# EAGLE board Adafruit 2.13in Tri-Color eInk with EYESPI (EAGLE 9.6.2)
REV: D
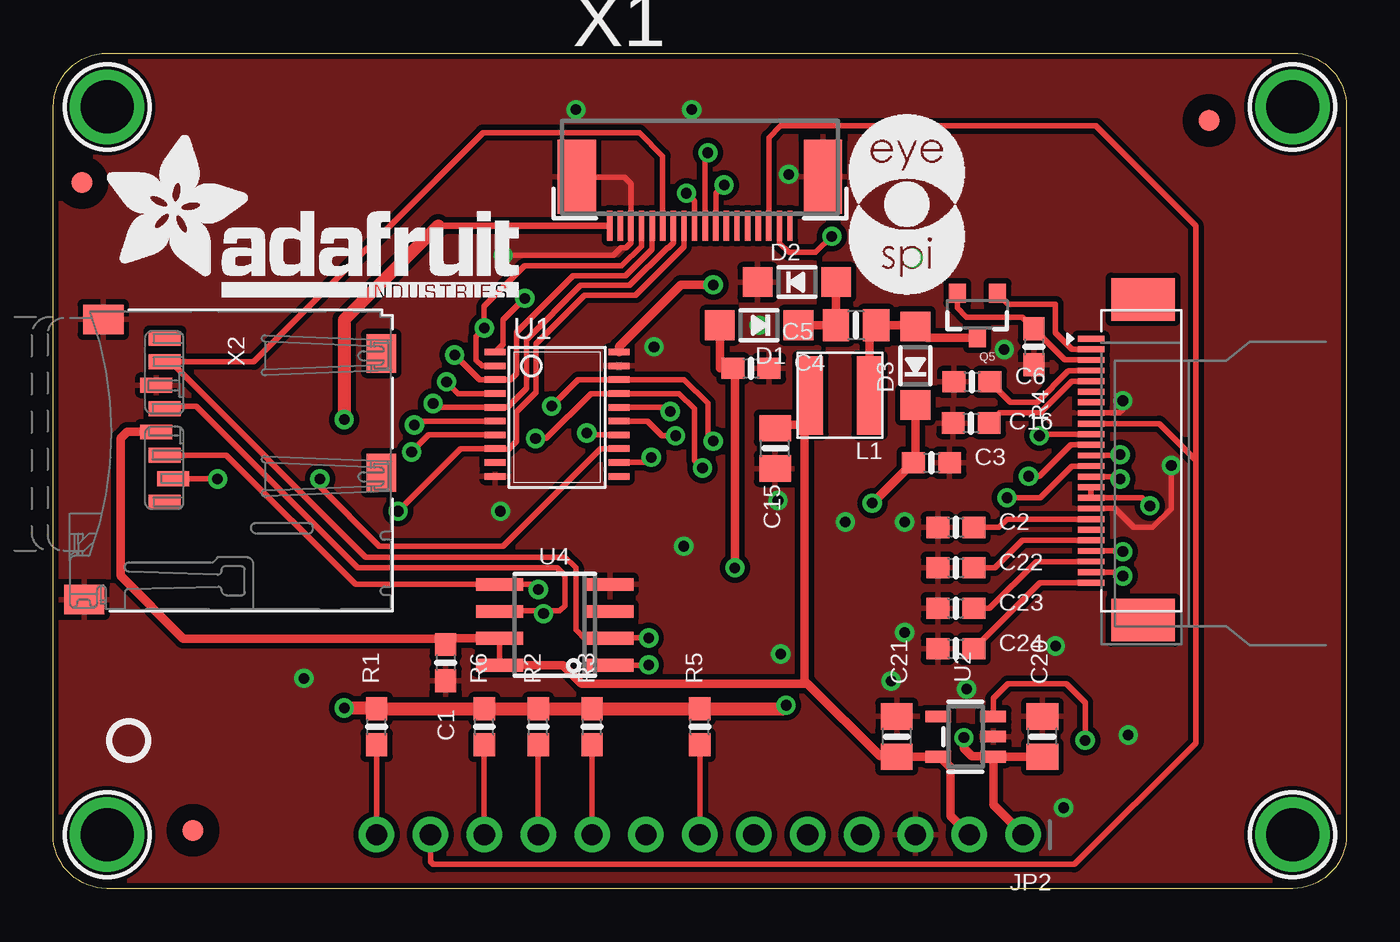
[diagram p0: board, top side]
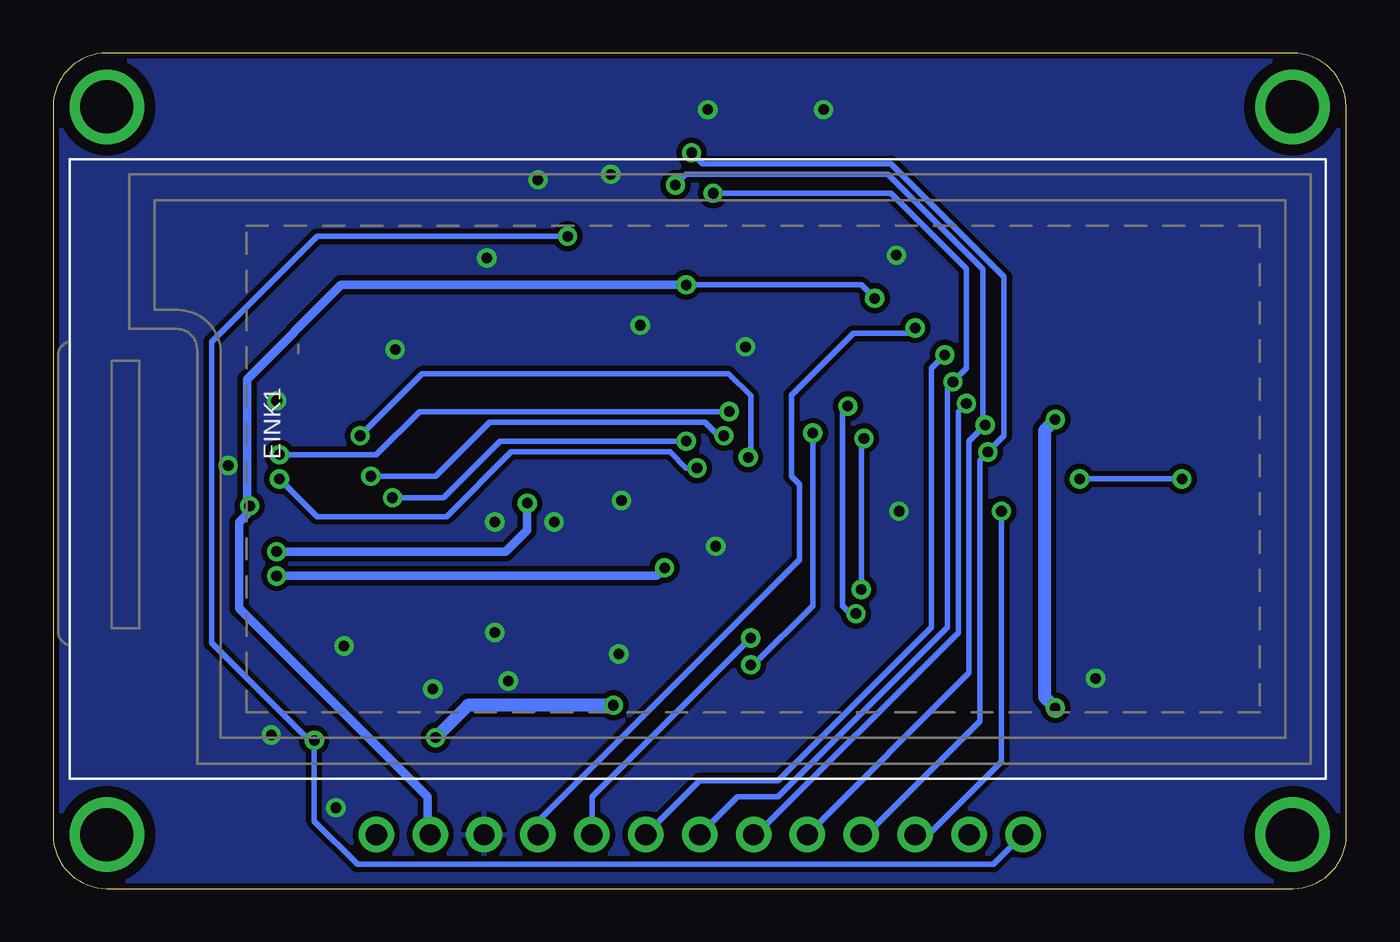
[diagram p1: board, bottom side, seen from below]

Size 60.97 x 39.37 mm. Coordinates in mm from the lower left corner, seen from the top.
Outline: 58.43,0 2.54,0 arc-90 0,2.54 0.01,36.83 arc-90 2.55,39.37 58.43,39.37 arc-90 60.97,36.83 60.97,2.54 arc-90 58.43,0
Copper layers (1*16): Top 0.035mm / dielectric 1.5mm / Bottom 0.035mm
Design rules "adafruit *": minimum track width 8mil, minimum drill 15.5mil, track to track 8mil, track to pad 8mil, pad to pad 8mil, via to via 8mil, smd to smd 8mil, copper to edge 10mil, drill to drill 8mil, minimum pad ring 10mil, minimum via ring 8mil, stop-mask expansion 2mil, vias tented up to drill 20mil, thermal gap 10mil

## Footprints (pad centres in the part's own frame; a part is rotated, then mirrored left to right if it is on the bottom)
0603-NO = smd 1.075 x 1: 1 -0.85,0; 2 0.85,0
0805-NO = smd 1.24 x 1.5: 1 -0.95,0; 2 0.95,0
SOD-123 = smd 1.4 x 1.4: A 1.85,0; C -1.85,0
EINK_213IN_104X212 = smd 0.275 x 1.25 bottom: 1 5.78,-0.87; 2 5.28,-0.87; 3 4.78,-0.87; 4 4.28,-0.87; 5 3.78,-0.87; 6 3.28,-0.87; 7 2.78,-0.87; 8 2.28,-0.87; 9 1.78,-0.87; 10 1.28,-0.87; 11 0.78,-0.87; 12 0.28,-0.87; 13 -0.22,-0.87; 14 -0.72,-0.87; 15 -1.22,-0.87; 16 -1.72,-0.87; 17 -2.22,-0.87; 18 -2.72,-0.87; 19 -3.22,-0.87; 20 -3.72,-0.87; 21 -4.22,-0.87; 22 -4.72,-0.87; 23 -5.22,-0.87; 24 -5.72,-0.87 | smd 2 x 3 bottom: SPRT1 7.63,1.59; SPRT2 -7.48,1.59
FIDUCIAL_1MM = smd 1 x 1: 1 0,0
1X13_ROUND_70 = drill 1 pad 1.676: 1 -15.24,0; 2 -12.7,0; 3 -10.16,0; 4 -7.62,0; 5 -5.08,0; 6 -2.54,0; 7 0,0; 8 2.54,0; 9 5.08,0; 10 7.62,0; 11 10.16,0; 12 12.7,0; 13 15.24,0
INDUCTOR_4X4MM_NR401 = smd 1.2 x 3.7: P$1 -1.4,0; P$2 1.4,0
SOT23-3 = smd 0.8 x 0.9: 1 -0.95,-1; 2 0.95,-1; 3 0,1.1
TSSOP20 = smd 0.305 x 0.991: 1 -2.925,-2.918; 2 -2.275,-2.918; 3 -1.625,-2.918; 4 -0.975,-2.918; 5 -0.325,-2.918; 6 0.325,-2.918; 7 0.975,-2.918; 8 1.625,-2.918; 9 2.275,-2.918; 10 2.925,-2.918; 11 2.925,2.918; 12 2.275,2.918; 13 1.625,2.918; 14 0.975,2.918; 15 0.325,2.918; 16 -0.325,2.918; 17 -0.975,2.918; 18 -1.625,2.918; 19 -2.275,2.918; 20 -2.925,2.918
SOT23-5 = smd 0.55 x 1.2: 1 -0.95,-1.3; 2 0,-1.3; 3 0.95,-1.3; 4 0.95,1.3; 5 -0.95,1.3
SOIC8_150MIL = smd 0.6 x 2.2: 1 -1.905,-2.6; 2 -0.635,-2.6; 3 0.635,-2.6; 4 1.905,-2.6; 5 1.905,2.6; 6 0.635,2.6; 7 -0.635,2.6; 8 -1.905,2.6
MOUNTINGHOLE_2.5_PLATED = drill 2.5 pad 3.2: P$1 0,0
EYE_SPI_DISPLAY_BOTCONTACT = smd 0.25 x 1.4: 1 4.25,1.154; 2 3.75,1.154; 3 3.25,1.154; 4 2.75,1.154; 5 2.25,1.154; 6 1.75,1.154; 7 1.25,1.154; 8 0.75,1.154; 9 0.25,1.154; 10 -0.25,1.154; 11 -0.75,1.154; 12 -1.25,1.154; 13 -1.75,1.154; 14 -2.25,1.154; 15 -2.75,1.154; 16 -3.25,1.154; 17 -3.75,1.154; 18 -4.25,1.154 | smd 1.8 x 3.5: SUPPORT1 -5.8,-1.152; SUPPORT2 5.8,-1.152
MICROSD = smd 0.7 x 1.5: 1 1.761,-3.147; 2 0.661,-2.747; 3 -0.439,-3.147; 4 -1.539,-3.547; 5 -2.639,-3.147; 6 -3.739,-3.547; 7 -4.839,-3.147; 8 -5.939,-3.147 | smd 1.8 x 1.4: CD1 -5.239,7.053; CD2 0.38,7.053 | smd 1.4 x 1.9: MT1 -6.839,-6.047; MT2 6.361,-6.947

## Placement (x,y rotation side)
C1  1uF/25V  [0603-NO]  18.5,10.65 270 top
C2  1uF/25V  [0603-NO]  42.56,17.02 0 top
C3  1uF/25V  [0603-NO]  41.41,20.07 0 top
C4  1uF/25V  [0603-NO]  32.9,24.51 0 top
C5  10uF/16V  [0805-NO]  37.86,26.54 180 top
C6  1uF/25V  [0603-NO]  43.32,23.88 0 top
C15  10uF/16V  [0805-NO]  34.04,20.74 90 top
C16  1uF/25V  [0603-NO]  43.28,21.93 0 top
C20  10uF/16V  [0805-NO]  46.64,7.16 90 top
C21  10uF/16V  [0805-NO]  39.77,7.16 90 top
C22  1uF/25V  [0603-NO]  42.56,15.11 0 top
C23  1uF/25V  [0603-NO]  42.56,13.21 0 top
C24  1uF/25V  [0603-NO]  42.56,11.3 0 top
D1  MBR0540  [SOD-123]  33.28,26.54 180 top
D2  MBR0540  [SOD-123]  35.06,28.57 0 top
D3  MBR0540  [SOD-123]  40.65,24.64 90 top
EINK1  EINK_24PIN_213IN  [EINK_213IN_104X212]  49.79,20.13 90 bottom
FID1  FIDUCIAL_1MM  [FIDUCIAL_1MM]  1.36,33.27 0 top
FID2  FIDUCIAL_1MM  [FIDUCIAL_1MM]  6.6,2.75 90 top
FID3  FIDUCIAL_1MM  [FIDUCIAL_1MM]  54.49,36.2 0 top
JP2  [1X13_ROUND_70]  30.49,2.54 180 top
L1  10uH  [INDUCTOR_4X4MM_NR401]  37.09,23.24 180 top
PLABEL0  [PLABEL0]  44.61,3.72 0 top
PLABEL1  [PLABEL1]  26.73,0.47 0 top
PLABEL2  [PLABEL2]  39.33,3.72 0 top
PLABEL3  [PLABEL3]  31.33,0.38 0 top
PLABEL4  [PLABEL4]  33.96,3.81 0 top
PLABEL5  [PLABEL5]  36.89,0.32 0 top
PLABEL6  [PLABEL6]  29.14,3.81 0 top
PLABEL7  [PLABEL7]  23.55,3.68 0 top
PLABEL8  [PLABEL8]  19.11,3.68 0 top
PLABEL9  [PLABEL9]  16.07,0.38 0 top
PLABEL10  [PLABEL10]  21.16,0.38 0 top
PLABEL11  [PLABEL11]  41.84,0.34 0 top
PLABEL12  [PLABEL12]  14.03,3.68 0 top
PLABEL13  [PLABEL13]  29.98,37.97 0 top
PLABEL14  [PLABEL14]  52.08,31.75 0 top
PLABEL15  [PLABEL15]  30.49,38.1 0 bottom
PLABEL16  [PLABEL16]  46.89,3.72 0 bottom
PLABEL17  [PLABEL17]  44.51,0.34 0 bottom
PLABEL18  [PLABEL18]  41.99,3.72 0 bottom
PLABEL19  [PLABEL19]  34.89,0.38 0 bottom
PLABEL20  [PLABEL20]  37.01,3.81 0 bottom
PLABEL21  [PLABEL21]  39.43,0.32 0 bottom
PLABEL22  [PLABEL22]  31.68,3.81 0 bottom
PLABEL23  [PLABEL23]  27.11,3.68 0 bottom
PLABEL24  [PLABEL24]  21.65,3.68 0 bottom
PLABEL25  [PLABEL25]  19.62,0.38 0 bottom
PLABEL26  [PLABEL26]  30.49,35.56 0 bottom
PLABEL27  [PLABEL27]  24.71,0.38 0 bottom
PLABEL28  [PLABEL28]  29.27,0.47 0 bottom
PLABEL29  [PLABEL29]  16.57,3.68 0 bottom
Q5  IRLML0100  [SOT23-3]  43.57,27.05 180 top
R1  100K  [0603-NO]  15.25,7.62 90 top
R2  100K  [0603-NO]  22.87,7.62 90 top
R3  100K  [0603-NO]  25.41,7.62 90 top
R4  0.47ohm  [0603-NO]  46.24,25.53 270 top
R5  100K  [0603-NO]  30.49,7.62 90 top
R6  100K  [0603-NO]  20.33,7.62 90 top
U1  74LVC245  [TSSOP20]  23.76,22.35 270 top
U2  AP2127K-3.3  [SOT23-5]  43.02,7.16 90 top
U4  23K640-I/SN  [SOIC8_150MIL]  23.65,12.43 90 top
U$3  MOUNTINGHOLE2.5  [MOUNTINGHOLE_2.5_PLATED]  58.43,2.54 0 top
U$4  MOUNTINGHOLE2.5  [MOUNTINGHOLE_2.5_PLATED]  2.55,2.54 0 top
U$5  MOUNTINGHOLE2.5  [MOUNTINGHOLE_2.5_PLATED]  58.43,36.83 0 top
U$6  MOUNTINGHOLE2.5  [MOUNTINGHOLE_2.5_PLATED]  2.55,36.83 0 top
U$9  [PCBFEAT-REV-040]  3.57,6.99 0 top
U$28  [ADAFRUIT_TEXT_20MM]  2.38,27.88 0 top
U$35  [EYESPI_MINI_LOGO]  37.48,27.94 0 top
X1  EYE_SPI_DISPLAY_FLIP  [EYE_SPI_DISPLAY_BOTCONTACT]  30.49,32.38 180 top
X2  MICROSD  [MICROSD]  8.42,19.98 270 top

## Library data of the parts
C1 = microbuilder; COMPANY: ADAFRUIT INDUSTRIES; DRAWN: K. TOWNSEND; REV: D
C2-C6 C15 C16 C20-C24 D1-D3 JP2 L1 R1-R6 U1 U4 U$9 U$28 = microbuilder
EINK1 = adafruit_display
FID1-FID3 = microbuilder; BOM: EXCLUDE
PLABEL0 PLABEL1-PLABEL29 = pinguin
Q5 = Parts; ROT: 270
U2 = adafruit_power; JLC_ROTATION: 0
U$3-U$6 = adafruit_electromech; BOM: EXCLUDE
U$35 = silks
X1 = adafruit_display; LCSC: C2856802
X2 = adafruit_electromech; JLC_ROTATION: 90; LCSC: C125617

## Nets
3.3V: C1.1 C15.2 C21.1 EINK1.15 EINK1.16 JP2.2 L1.P$2 U1.1 U1.20 U2.5 U4.7 U4.8 X2.4
BUSY: EINK1.9 JP2.12 X1.16
DC: JP2.8 U1.5 X1.7
DC_3V: EINK1.11 U1.15
DISPCS: JP2.7 R5.1 U1.4 X1.9
DISPCS_3V: EINK1.12 U1.16
ENABLE: JP2.13 R1.1 U2.3 X1.17
GDR: EINK1.2 Q5.1
GND: C1.2 C2.1 C3.2 C4.2 C6.1 C15.1 C16.1 C20.2 C21.2 C22.1 C23.1 C24.1 D2.C EINK1.8 EINK1.17 JP2.3 R4.2 U1.10 U1.19 U2.2 U4.4 X1.3 X1.SUPPORT1 X1.SUPPORT2 X2.6 X2.MT1 X2.MT2
MISO: JP2.5 U4.2 X1.6 X2.7
MOSI: JP2.6 U1.3 X1.5
MOSI_3V: EINK1.14 U1.17 U4.5 X2.3
N$2: C5.2 D1.C D2.A
N$3: C5.1 D3.A L1.P$1 Q5.3
N$4: C16.2 EINK1.5
N$5: C2.2 EINK1.18
N$6: C22.2 EINK1.20
N$9: C6.2 EINK1.4
N$27: C23.2 EINK1.22
N$33: C24.2 EINK1.24
RESE: EINK1.3 Q5.2 R4.1
RESET: JP2.11 R6.1 U1.8 X1.8
RESET_3V: EINK1.10 U1.12
SCLK: JP2.4 U1.2 X1.4
SCLK_3V: EINK1.13 U1.18 U4.6 X2.5
SDCS: JP2.10 R2.1 U1.7 X1.10
SDCS_3V: U1.13 X2.2
SRAMCS: JP2.9 R3.1 U1.6 X1.11
SRAMCS_3V: U1.14 U4.1
TSCL: EINK1.6
TSDA: EINK1.7
VGH: C3.1 D3.C EINK1.21
VGL: C4.1 D1.A EINK1.23
VIN: C20.1 JP2.1 R1.2 R2.2 R3.2 R5.2 R6.2 U2.1 X1.1

## Tracks (layer width: path | path; a pad name or v marks a point on that pad's centre or on a via)
3.3V  (via drill 0.5)
  Top 0.254: U4.7 U4.8 | EINK1.15 EINK1.16 51.32,18.41 v51.7,18.03 | X2.4 | U1.1 21.22,25.66 21.22,26.8 v22.24,27.81
  Top 0.406: 18.5,11.77 6.14,11.77 3.19,14.73 3.19,21.21 3.49,21.52 X2.4 | L1.P$2 35.41,22.96 35.41,21.84 | 35.57,9.65 39,6.22 39.77,6.22 C21.1 U2.5 41.8,6.21 42.3,5.71 42.3,3.43 JP2.2 | U4.8 24.03,10.52 24.9,9.65 35.57,9.65 | U4.7 18.5,11.79 18.5,11.77 | 18.5,11.77 C1.1 | 35.57,9.65 35.41,9.81 35.41,21.84 | C15.2 34.2,21.84 35.41,21.84 | U1.20 26.68,25.52 29.6,28.45 v31.13,28.45
  Bottom 0.254: v22.24,27.81 22.87,28.45 v31.13,28.45
  Bottom 0.406: v31.13,28.45 47.38,28.45 51.83,24 51.83,18.16 v51.7,18.03 51.7,17.78 52.21,17.27 52.21,13.21 43.32,4.32 43.32,2.67 JP2.2
BUSY
  Top 0.254: JP2.12 17.79,1.27 17.92,1.14 48.14,1.14 53.86,6.86 53.86,20.19 | EINK1.9 52.14,21.91 53.86,20.19 | X1.16 33.74,35.38 34.3,35.94 49.16,35.94 53.86,31.24 53.86,20.19
DC  (via drill 0.5)
  Top 0.254: v17.92,22.86 18.1,22.68 U1.5 21.42,22.68 22.31,23.57 22.31,25.86 24.88,28.42 27.19,28.42 28.96,30.2 29,30.2 29.24,30.44 X1.7
  Bottom 0.254: v17.92,22.86 18.3,22.48 18.3,12.06 27.82,2.54 JP2.8
DC_3V  (via drill 0.5)
  Top 0.254: v29.35,21.34 28.71,21.34 28.02,22.03 U1.15 | EINK1.11 47.97,20.91 46.49,19.43 v45.98,19.43
  Bottom 0.254: v29.35,21.34 29.6,21.34 30.24,21.97 40.4,21.97 42.94,19.43 v45.98,19.43
DISPCS  (via drill 0.5)
  Top 0.254: R5.1 JP2.7 | U1.4 19.1,23.33 v18.55,23.88 | X1.9 30.24,32.38 v29.86,32.77
  Bottom 0.254: JP2.7 28.71,4.32 26.81,4.32 18.81,12.32 18.81,23.88 v18.55,23.88 17.92,24.51 17.92,29.21 21.47,32.77 v29.86,32.77
DISPCS_3V  (via drill 0.5)
  Top 0.254: v50.3,20.45 50.27,20.41 EINK1.12 | U1.16 28.9,22.68 v29.09,22.48
  Bottom 0.254: v29.09,22.48 43.7,22.48 45.73,20.45 v50.3,20.45
ENABLE  (via drill 0.5)
  Top 0.254: U2.3 44.32,8.97 45,9.65 47.76,9.65 48.65,8.76 v48.65,6.99 | R1.1 JP2.13 | v36.71,30.73 35.95,29.97 34.68,29.97 34.24,30.41 X1.17
  Bottom 0.254: JP2.13 16.65,1.14 46.62,1.14 48.65,3.17 v48.65,6.99 48.91,6.99 53.5,11.58 53.5,25.76 48.52,30.73 v36.71,30.73
GDR
  Top 0.254: EINK1.2 48.04,25.41 47.25,26.19 47.25,27.54 45.03,27.54 Q5.1
GND  (via drill 0.5)
  Top 0.254: EINK1.8 50.27,22.41 50.43,22.57 v50.43,22.99 | EINK1.17 50.05,17.91 50.94,17.02 51.83,17.02 52.72,17.91 v52.72,19.94 | X1.SUPPORT2 24.7,33.53 26.93,33.53 27.24,33.22 X1.3 27.24,30.44 27,30.2 26.78,30.2 26.43,29.84 v21.22,29.84
  other vias: 34.17,18.29 33.28,26.54 40.52,29.72 40.14,17.27 34.3,11.05 29.73,16.13 21.09,17.78 43.06,9.4 37.35,17.27 40.14,12.06 39.51,9.78 47.25,11.43 50.68,7.24 28.33,25.53 44.84,25.4 11.82,9.91 47.64,3.81 38.11,33.4 34.68,33.66 24.65,36.7 30.11,36.7
  pour Top (isolate 0.254): 0.01,39.37 60.97,39.37 60.97,0 0.01,0
  pour Bottom (isolate 0.254): 0.01,39.37 60.97,39.37 60.97,0 0.01,0
MISO  (via drill 0.5)
  Top 0.254: 5.55,24.82 14.74,15.62 24.14,15.62 24.65,15.11 24.65,12.19 25.16,11.68 26.15,11.68 U4.2 26.36,11.68 26.49,11.81 v28.08,11.81 | 5.55,24.82 X2.7 | X1.6 28.74,34.52 27.64,35.62 20.26,35.62 9.46,24.82 5.55,24.82
  Bottom 0.254: v28.08,11.81 35.57,4.32 JP2.5
MOSI  (via drill 0.5)
  Top 0.254: v18.93,25.15 20.1,23.98 U1.3 21.57,23.98 21.85,24.26 21.85,26.21 24.52,28.88 27,28.88 28.24,30.12 X1.5
  Bottom 0.254: v18.93,25.15 19.57,24.51 19.57,12.32 26.81,5.08 30.49,5.08 JP2.6
MOSI_3V  (via drill 0.5)
  Top 0.254: v22.87,14.1 22.64,14.33 U4.5 14.26,14.33 8.17,20.42 X2.3 | v30.62,19.81 30.24,20.19 30.24,22.61 29.52,23.33 U1.17 25.37,23.33 23.25,21.21 v22.74,21.21 | EINK1.14 50.07,19.41 50.18,19.3 v50.3,19.3
  Bottom 0.254: v22.74,21.21 22.87,21.08 v22.87,14.1 | v30.62,19.81 31.13,19.81 31.89,20.57 39.38,20.57 42.43,17.53 48.52,17.53 v50.3,19.3
N$2
  Top 0.406: D2.A C5.2 D1.C
N$3
  Top 0.406: L1.P$1 38.49,26.23 C5.1 40.6,26.54 D3.A 41.19,25.95 Q5.3
N$4
  Top 0.254: C16.2 44.61,22.42 46.54,22.42 48.04,23.91 EINK1.5
N$5
  Top 0.254: C2.2 44.59,17.02 44.98,17.41 EINK1.18
N$6
  Top 0.254: EINK1.20 45.69,16.41 44.39,15.11 C22.2
N$9
  Top 0.254: C6.2 45.13,22.92 46.4,22.92 47.85,24.37 | EINK1.4 47.89,24.41 47.85,24.37 | 47.85,24.37
N$27
  Top 0.254: EINK1.22 46.34,15.41 44.14,13.21 C23.2
N$33
  Top 0.254: C24.2 46.51,14.41 EINK1.24
RESE
  Top 0.254: Q5.2 42.62,27.37 43.06,26.92 45.69,26.92 R4.1 47.71,24.91 EINK1.3
RESET  (via drill 0.5)
  Top 0.254: R6.1 JP2.11 | v16.27,17.78 19.21,20.73 U1.8 20.87,20.7 21.47,20.7 21.85,21.08 21.85,22.47 22.77,23.38 22.77,25.67 25.07,27.96 27.47,27.96 29.74,30.24 X1.8
  Bottom 0.254: v16.27,17.78 16.27,5.97 19.7,2.54 JP2.11
RESET_3V  (via drill 0.5)
  Top 0.254: v46.49,21.34 46.49,21.41 EINK1.10 | U1.12 27.96,20.08 v28.2,20.32
  Bottom 0.254: v46.49,21.34 43.57,24.26 29.12,24.26 28.08,23.21 28.08,20.45 v28.2,20.32
SCLK  (via drill 0.5)
  Top 0.254: U1.2 20.21,24.63 19.95,24.89 19.95,26.04 v20.33,26.42 20.33,27.43 22.24,29.34 26.81,29.34 27.74,30.27 X1.4
  Bottom 0.254: JP2.4 38.11,3.17 25.79,15.49 25.79,19.05 26.17,19.43 26.17,23.24 23.25,26.16 20.58,26.16 v20.33,26.42
SCLK_3V  (via drill 0.5)
  Top 0.254: 23.12,13.08 23.89,13.08 24.14,13.34 24.14,14.73 23.76,15.11 14.36,15.11 6.74,22.73 5.39,22.73 X2.5 5.27,22.6 | 23.12,13.08 21.07,13.08 U4.6 | 23.12,13.08 v23.12,12.95 | v23.51,22.73 24.75,23.98 U1.18 29.75,23.98 30.87,22.86 30.87,21.34 v31.13,21.08 | v44.97,18.41 v44.97,18.42 46.54,18.42 48.04,19.91 EINK1.13
  Bottom 0.254: v23.51,22.73 23.76,22.48 23.76,13.34 23.38,12.95 v23.12,12.95 | v31.13,21.08 39.89,21.08 42.56,18.41 v44.97,18.41
SDCS  (via drill 0.5)
  Top 0.254: R2.1 JP2.10 | U1.7 17.7,21.38 v16.9,20.57 | X1.10 30.74,34.54 v30.87,34.67
  Bottom 0.254: JP2.10 22.62,2.54 17.28,7.87 17.28,20.19 v16.9,20.57 16.14,21.34 16.14,28.83 21.47,34.16 30.36,34.16 v30.87,34.67
SDCS_3V  (via drill 0.5)
  Top 0.254: U1.13 25.82,20.73 21.22,16.13 15.38,16.13 12.58,18.92 v12.58,19.3 | v7.76,19.3 5.68,19.3 X2.2
  Bottom 0.254: v12.58,19.3 v7.76,19.3
SRAMCS  (via drill 0.5)
  Top 0.254: R3.1 JP2.9 | U1.6 17.21,22.03 v17.03,21.84 | X1.11 31.24,32.75 v31.63,33.15
  Bottom 0.254: JP2.9 17.79,10.16 17.79,21.08 v17.03,21.84 17.13,21.95 17.13,29.18 21.61,33.66 31.13,33.66 v31.63,33.15
SRAMCS_3V  (via drill 0.5)
  Top 0.254: U4.1 28.06,10.52 v28.08,10.54 | v25.16,21.46 25.28,21.46 25.41,21.34 25.45,21.38 U1.14
  Bottom 0.254: v25.16,21.46 25.16,13.34 27.95,10.54 v28.08,10.54
VGH  (via drill 0.5)
  Top 0.254: v50.43,15.88 50.4,15.91 EINK1.21
  Top 0.406: D3.C 40.65,20.13 40.59,20.07 C3.1 40.52,20.07 v38.62,18.16
  Bottom 0.406: v50.43,15.88 39.63,15.88 38.62,16.89 v38.62,18.16
VGL  (via drill 0.5)
  Top 0.254: D1.A 31.45,26.53 | EINK1.23 50.12,14.91 50.3,14.73 v50.43,14.73
  Top 0.406: 31.45,26.53 31.45,24.51 C4.1 32.14,24.42 v32.14,15.11
  Bottom 0.406: v50.43,14.73 32.52,14.73 v32.14,15.11
VIN  (via drill 0.5)
  Top 0.305: X1.1 18.16,31.23 | 15.21,8.51 R1.2
  Top 0.406: JP2.1 44.32,3.95 U2.1 | v42.94,7.11 42.94,6.6 43.32,6.22 44.31,6.22 U2.1 | C20.1 U2.1
  Top 0.61: R1.2 R6.2 R2.2 R3.2 R5.2 34.39,8.47 v34.55,8.64 | v13.73,22.1 13.73,26.8 18.16,31.23 | v13.73,8.51 15.21,8.51
  Bottom 0.61: v34.55,8.64 41.41,8.64 v42.94,7.11 | v13.73,22.1 14.23,21.59 14.23,9.02 v13.73,8.51

## Text on the board
Pinguin_tBackup: 2.13" Diagonal E-Ink Display | with SRAM buffer / & MicroSD card | ENA | RST | SRCS | ECS | MISO | GND | VIN | BUSY | SDCS | D/C | MOSI | SCK | 3V3
Pinguin_bBackup: 2.13" Diagonal E-Ink Display | Adafruit Industries | ENA | RST | SRCS | ECS | MISO | GND | VIN | BUSY | SDCS | D/C | MOSI | SCK | 3V3